# Altium PCB Channels.PcbDoc
Units mil, origin at the board's own origin, x right, y up, seen from the top; angles counter-clockwise.
Board outline 6000 x 4000 mil, 4 copper layers (Top Layer, Signal Layer 2, Signal Layer 1, Bottom Layer), stack 30.634 mil thick; 23 components, 19 nets, 61 pads, 16 vias.
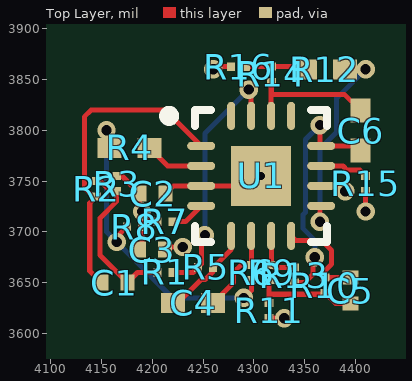
[diagram p0: Top Layer view]
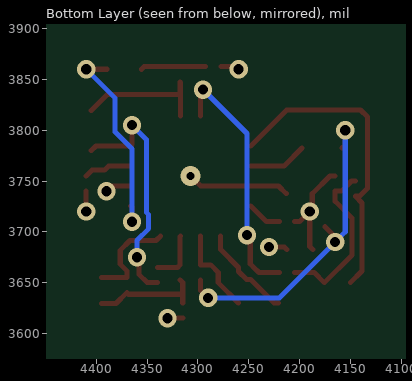
[diagram p1: Bottom Layer view, seen from below]
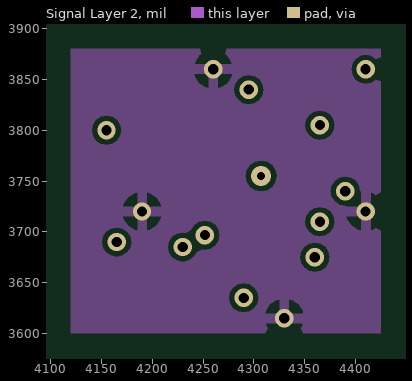
[diagram p2: Signal Layer 2]
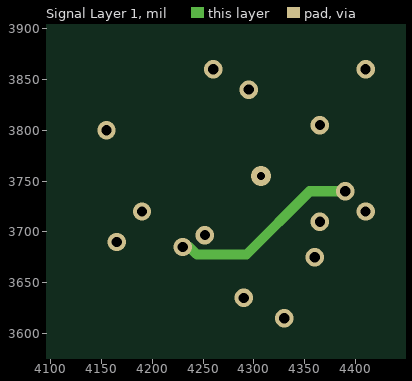
[diagram p3: Signal Layer 1]

## Layer stack, top to bottom
Top Solder: solder mask 0.4, Solder Resist, Dk 3.5
Top Layer: signal copper 1.4
Dielectric 1: core 10, FR-4, Dk 4.2
Signal Layer 2: signal copper 1.417
Dielectric 3: prepreg 5, Dk 4.2
Signal Layer 1: signal copper 1.417
Dielectric 2: core 10, Dk 4.2
Bottom Layer: signal copper 1.4
Bottom Solder: solder mask 0.4, Solder Resist, Dk 3.5

## Board outline
1000,1000 7000,1000 7000,5000 1000,5000

## Design rules (kind name [scope] priority, off if disabled: settings)
Clearance [All] p1: gap=5 ignorepadtopadclearanceinfootprint=FALSE except(0: Arc-Hole Track-Hole SMDPad-Hole THPad-Hole Via-Hole Fill-Hole Poly-Hole Region-Hole Text-Hole)
PolygonConnect [All] p1: connectstyle=Relief reliefconductorwidth=10 reliefentries=4 polygonreliefangle="90 Angle" airgapwidth=10
RoomDefinition Channels [InComponentClass('Channels')] p1: confinementstyle=ConfineIn formatcopy=TRUE lockcomponents=FALSE outline 4115,3595 4430,3595 4430,3885 4115,3885
RoutingVias [All] p1: holewidth=28 width=50 viastyle="Through Hole" minholewidth=10 minwidth=18 maxholewidth=28 maxwidth=50
SolderMaskExpansion [All] p1: expansion=4
Width [All] p1: maxlimit=10 minlimit=5 preferedwidth=10 toplayer_prefwidth=5 midlayer1_minwidth=10 midlayer2_minwidth=10 bottomlayer_prefwidth=5 minimp=50.000000 maximp=50.000000 favimp=50.000000
30 further rules are at their usual default settings.

## Components (designator, comment, footprint, x,y, rotation, side; value= is the part's Value field where it differs from the comment)
C1 "Cap Semi" 0201 4162.8,3650 r180 top value=2.7nF
C2 "Cap Semi" 0201 4200.31,3737.56 r0 top value=100nF
C3 "Cap Semi" 0201 4199.72,3682.56 r0 top value=100nF
C4 "Cap Semi" 0402 4240.31,3630 r180 top value=0.47uF
C5 "Cap Semi" 0201 4395,3642.2 r90 top value=2.7nF
C6 "Cap Semi" 0402 4405,3799.69 r270 top value=0.47uF
R1 "Res3" 01005 4212.52,3660 r0 top value=3.9k
R2 "Res3" 01005 4145,3742.48 r270 top value=100M
R3 "Res3" 01005 4165,3747.48 r270 top value=200
R4 "Res3" 0402 4177.83,3782.56 r0 top value=100M
R5 "Res3" 01005 4252.52,3665 r180 top value=1M
R6 "Res3" 01005 4297.52,3660.04 r90 top value=100k
R7 "Res3" 01005 4212.48,3710 r180 top value=1M
R8 "Res3" 01005 4182.48,3705 r180 top value=1M
R9 "Res3" 01005 4317.52,3660.04 r90 top value=3.9k
R10 "Res3" 01005 4370,3647.52 r90 top value=100M
R11 "Res3" 01005 4315,3622.52 r90 top value=200
R12 "Res3" 0402 4370,3860 r0 top value=100M
R13 "Res3" 01005 4340,3657.52 r90 top value=1M
R14 "Res3" 01005 4317.52,3855.08 r270 top value=100k
R15 "Res3" 01005 4410,3747.48 r270 top value=1M
R16 "Res3" 01005 4285,3862.56 r0 top value=1M
U1 "AD8643ACPZ-REEL7" ADI-CP-16-3_N 4307.2,3755.04 r0 top

## Footprints (in the part's own frame and the unit in brackets; to place one, negate y for a bottom-side part, rotate by r counter-clockwise, add the part's x,y. Pads: shape width x height; smd on the part's side, far side on the other; paste and mask are expansions set on the pad)
0201 [mm]
  rect 0.35x0.4 smd: 1(-0.325,0) 2(0.325,0)
0402 [mm] "Chip Capacitor, Body 1.0x0.5mm, IPC High Density"
  rect 0.6x0.5 smd: 1(-0.5,0) 2(0.5,0)
  body extent -0.55,-0.3 0.55,0.3, height 1.3
01005 [mm]
  rect 0.2x0.22 smd: 1(-0.19,0) 2(0.19,0)
ADI-CP-16-3_N [mm] "QFN, 16-Leads, Body 3x3mm, Pitch 0.5mm, Thermal Pad 1.5x1.5mm, IPC Medium Density"
  oval 0.7x0.2 smd: 1(-1.5,0.75) 2(-1.5,0.25) 3(-1.5,-0.25) 4(-1.5,-0.75) 9(1.5,-0.75) 10(1.5,-0.25) 11(1.5,0.25) 12(1.5,0.75)
  oval 0.2x0.7 smd: 5(-0.75,-1.5) 6(-0.25,-1.5) 7(0.25,-1.5) 8(0.75,-1.5) 13(0.75,1.5) 14(0.25,1.5) 15(-0.25,1.5) 16(-0.75,1.5)
  rect 1.5x1.5 smd: 17(0,0)
  silkscreen extent -2.42,-1.65 1.65,1.65, body extent -1.5,-1.5 1.5,1.5, height 0.9

## Part data
C1 C2 C3 C4 C5 C6: "Capacitor (Semiconductor SIM Model)", LatestRevisionDate=29-May-2009, LatestRevisionNote="IPC-7351 Footprint Added.", PackageDescription="Chip Capacitor", PackageReference=C1206, Published=8-Jun-2000, Publisher="Altium Limited"
R1 R2 R3 R4 R5 R6 R7 R8 R9 R10 R11 R12 R13 R14 R15 R16: "Resistor", LatestRevisionDate=29-May-2009, LatestRevisionNote="IPC-7351 Footprint Added.", PackageDescription="Chip Resistor", PackageReference=J1-0603, Published=8-Jun-2000, Publisher="Altium Limited"
U1: "Quad Channel Very Low Input Bias Current Operational Amplifier, 3.5 MHz BW, 3 V/us SR, Industrial, 16-pin QFN (CP-16-3), Reel", Amplifiers Per Package=4, Generic Part Number=AD8643, Input Bias Current=250fA, Input Offset Voltage=50uV, Manufacturer="Analog Devices", Supplier Part Number 1=AD8643ACPZ-REEL7TR-ND, Code_JEDEC=MO-220-VEED-2, ComponentLink1Description="Manufacturer URL", ComponentLink1URL=http://www.analog.com/en/index.html, ComponentLink2Description=Datasheet, ComponentLink2URL=http://www.analog.com/static/imported-files/data_sheets/AD8641_8642_8643.pdf, ComponentLink3Description="Package Specification", ComponentLink3URL=http://www.analog.com/static/imported-files/packages/PKG_PDF/LFCSP(CP)/CP_16_3.pdf, DatasheetVersion="Rev. E", Iq/Amp=290uA, Mounting Technology="Surface Mount", PackageDescription="16-Pin Lead Frame Chip Scale Package, Body 3 x 3 mm, Pitch 0.5 mm", PackageReference=CP-16-3, PartNumber=AD8643ACPZ-REEL7, Slew Rate=3V/us, Small Signal Bandwidth=3.5MHz, Supplier 1=Digi-Key, Supplier 2=Digi-Key, Supplier 3=Digi-Key, Supplier 4=Newark, Supplier Part Number 2=AD8643ACPZ-REEL7CT-ND, Supplier Part Number 3=AD8643ACPZ-REEL7DKR-ND, Supplier Part Number 4=59K7031, V Span Max=26V, V Span Min=5V

## Via types
v1: diameter 18, hole 10, Top Layer to Bottom Layer, 15 vias
v2: diameter 19.68, hole 7.87, Top Layer to Bottom Layer, 1 vias

## Nets (pads, with @x,y where several pads share a name; then routed paths per layer and width w, separated by ;. In a path a pad name is that pad's centre, name@x,y a point inside that pad or via, vN(x,y) a via of type N, cw(c..) or ccw(c..) an arc to the next point about the centre after c; other vN are vias at no path point)
3.3V: C2.2 U1.3 U1.17 | length 101.3
  Top Layer w5: C2.2 4220.75,3745.2 U1.3 4297.36,3745.2 v2(4307.2,3755.04)
-3.3V: C3.2 U1.10 | length 233.1
  Top Layer w5: C3.2 4214.96,3685 v1(4230,3685) ; U1.10 4384.8,3745.2 v1(4390,3740)
  Signal Layer 1 w10: v1(4230,3685) 4236.69,3685 4243.91,3677.78 4292.78,3677.78 4355,3740 v1(4390,3740)
GND: C2.1 C3.1 R3.1 R7.2 R8.1 R11.1 R15.2 R16.1 | length 159.8
  Top Layer w5: R3.1 4170.12,3754.96 C2.1 4187.52,3722.48 v1(4190,3720) ; C3.1 4189.96,3685.59 R8.1 v1(4190,3720) v1(4190,3720) ; R7.2 4200,3710 v1(4190,3720) ; v1(4260,3860) 4262.56,3862.56 R16.1 ; R11.1 v1(4330,3615) v1(4330,3615) ; v1(4410,3720) R15.2
NetC1_1: C1.1 R1.1 R2.1 R3.2 | length 165.8
  Top Layer w5: R2.1 4148.91,3749.96 4158.87,3740 R3.2 4165,3730 4148.5,3713.5 4148.5,3677.09 C1.1 4185.59,3660 R1.1
NetC1_2: C1.2 R2.2 U1.1 | length 310.3
  Top Layer w5: C1.2 4138.5,3661.5 4138.5,3728.5 R2.2 4141.09,3735 4133.17,3742.92 4133.17,3813.17 4140,3820 4212.72,3820 U1.1
NetC4_1: C4.1 R6.2 U1.6 | length 87.4
  Top Layer w5: C4.1 4280,3650 4280,3660 4287.52,3667.52 R6.2 4297.52,3695.83 U1.6
NetC4_2: C4.2 R5.1 U1.5 | length 94.5
  Top Layer w5: C4.2 4225,3630 4248.17,3653.17 4252.08,3653.17 4260,3661.09 R5.1 4277.68,3682.68 U1.5
NetC5_1: C5.1 R9.1 R10.1 R11.2 | length 109.2
  Top Layer w5: R11.2 4315,3640.02 ; R9.1 4315,3650.04 4315,3640.02 ; C5.1 4380.63,3629.41 R10.1 4368.56,3638.6 4316.42,3638.6 4315,3640.02
NetC5_2: C5.2 R10.2 U1.8 | length 100.2
  Top Layer w5: U1.8 4341.22,3691.5 4366.83,3691.5 4376.5,3681.83 4376.5,3668.17 4370,3661.67 R10.2 C5.2
NetC6_1: C6.1 R14.2 U1.14 | length 140.6
  Top Layer w5: U1.14 4317.05,3847.13 R14.2 4317.52,3835 4331.62,3835 4332,3835.37 4389,3835.37 C6.1
NetC6_2: C6.2 R13.1 U1.12 | length 242.3
  Top Layer w5: R13.1 4350.04,3650.04 4358.17,3658.17 4358.17,3673.17 v1(4360,3675) ; v1(4365,3805) 4365,3785.83 U1.12 4400.43,3784.57 C6.2
  Bottom Layer w5: v1(4360,3675) 4360,3691.67 4348.5,3703.17 4348.5,3716.83 4350.83,3719.17 4350.83,3790.83 v1(4365,3805)
NetR1_2: R1.2 R5.2 U1.15 | length 249.7
  Top Layer w5: R1.2 4240.04,3660 R5.2 4248.56,3668.52 4248.56,3693.56 v1(4251.78,3696.78) ; v1(4295,3840) 4297.36,3837.64 U1.15
  Bottom Layer w5: v1(4251.78,3696.78) 4251.78,3796.78 v1(4295,3840)
NetR4_1: R4.1 R6.1 R8.2 | length 320.5
  Top Layer w5: v1(4155,3800) 4155,3785.71 R4.1 ; v1(4165,3690) 4165,3695 R8.2 ; v1(4290,3635) 4297.52,3642.52 R6.1
  Bottom Layer w5: v1(4155,3800) 4155,3700 v1(4165,3690) 4220,3635 v1(4290,3635)
NetR4_2: R4.2 U1.2 | length 58
  Top Layer w5: R4.2 4215.2,3764.88 U1.2
NetR7_1: R7.1 U1.4 | length 34.6
  Top Layer w5: R7.1 4232.64,3710 U1.4
NetR9_2: R9.2 R13.2 U1.7 | length 52.2
  Top Layer w5: U1.7 4317.52,3695.51 R9.2 4320.04,3665 R13.2
NetR12_1: R12.1 R14.1 R16.2 | length 64.2
  Top Layer w5: R16.2 R14.1 4353.07,3862.56 R12.1@4355.63,3860
NetR12_2: R12.2 U1.9 | length 205
  Top Layer w5: v1(4365,3710) 4365,3724.25 U1.9 ; R12.2 v1(4410,3860)
  Bottom Layer w5: v1(4365,3710) 4365,3781.67 4381.5,3798.17 4381.5,3831.5 v1(4410,3860)
NetR15_1: R15.1 U1.11 | length 47.8
  Top Layer w5: U1.11 4387.86,3764.88 4392.05,3760.69 4404.27,3760.69 R15.1
pads on no net: U1.13 U1.16

## Polygon pours and split planes (outlines as drawn)
GND on Signal Layer 2 "Signal Layer 2-No Net" (solid, pour order 0): 4120,3600 4120,3880 4425,3880 4425,3600